# Altium PCB Arrows Keypad.PcbDoc
Units mil, origin at the board's own origin, x right, y up, seen from the top; angles counter-clockwise.
Board outline 2300 x 1915 mil, 2 copper layers (Top Layer, Bottom Layer); 9 components, 6 nets, 42 pads, 0 vias.
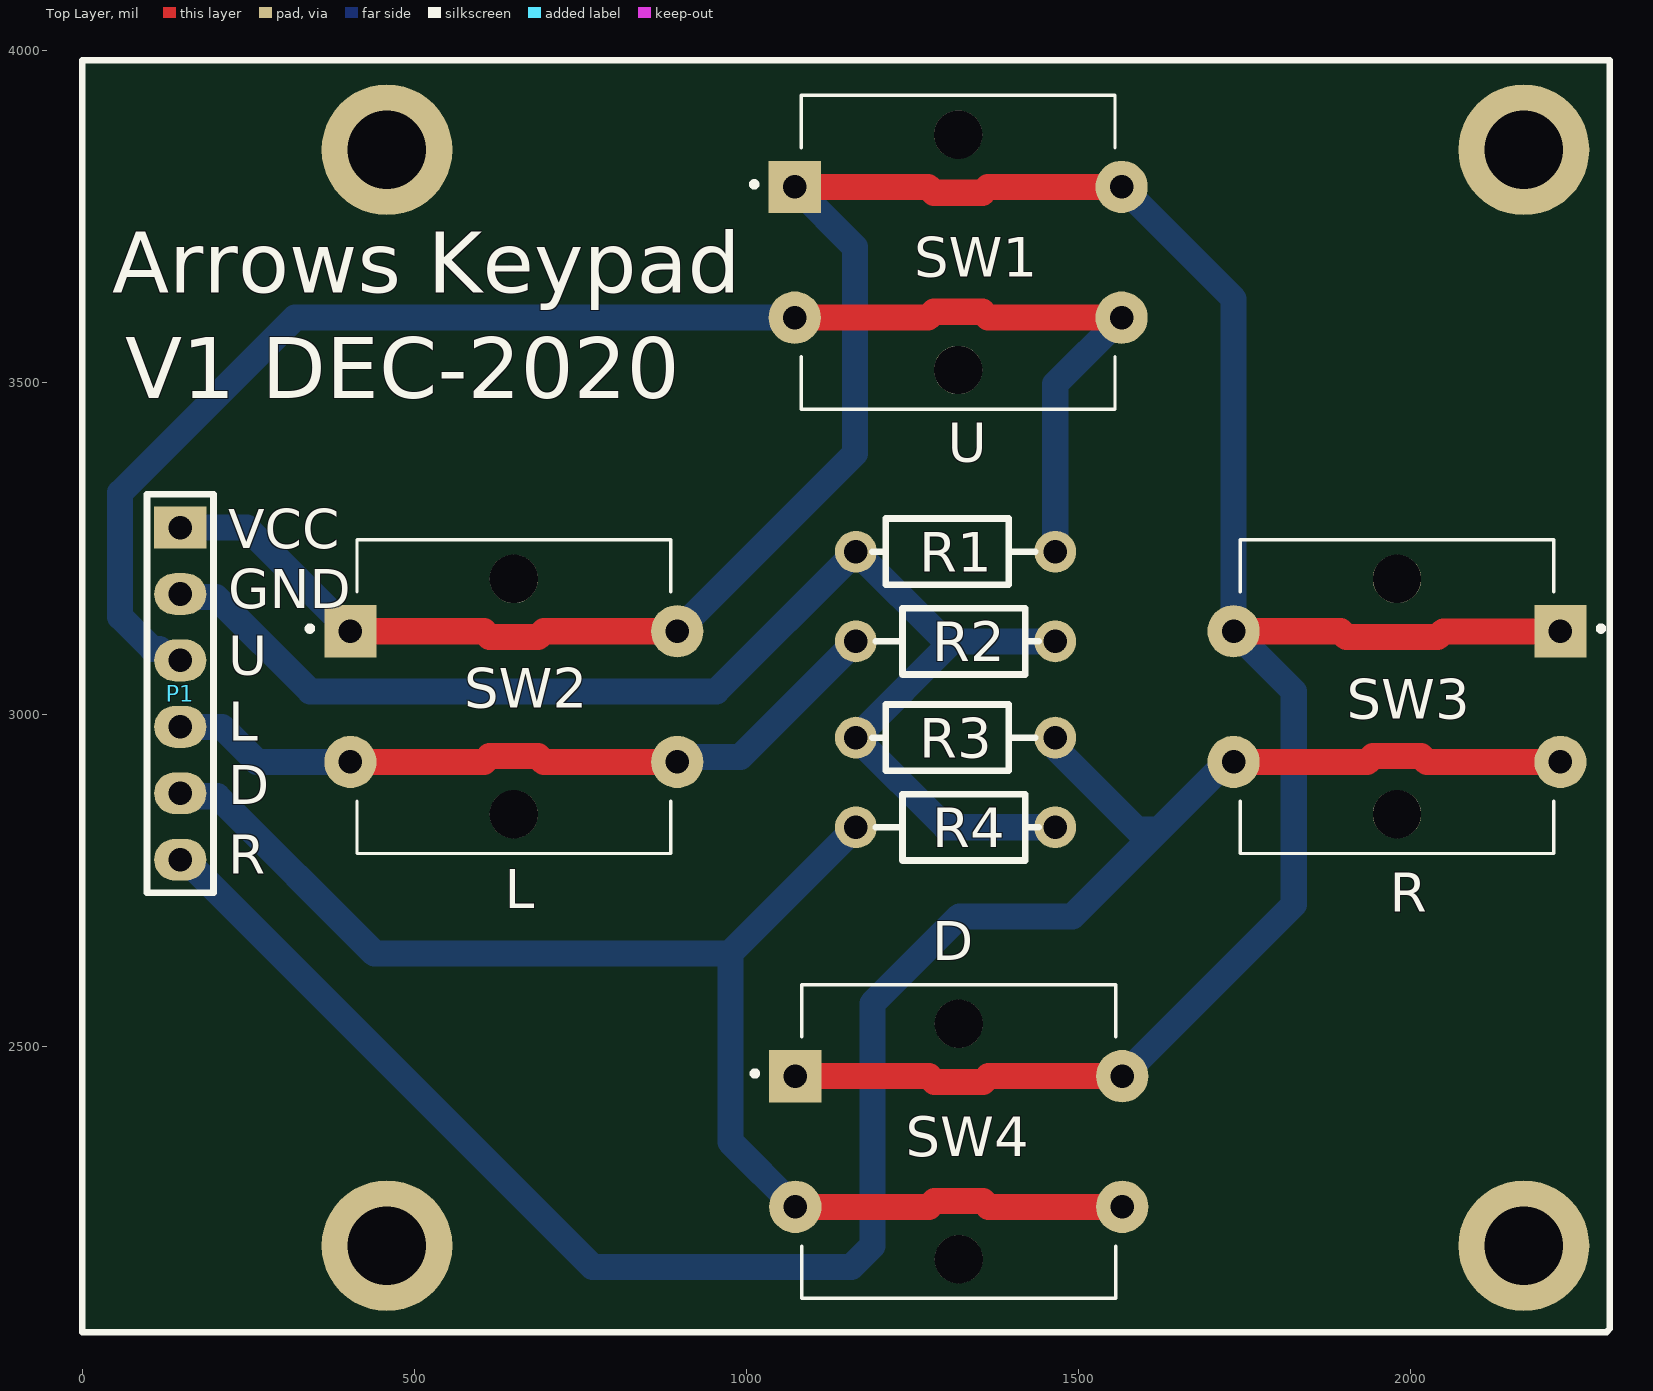
[diagram p0: Top Layer view]
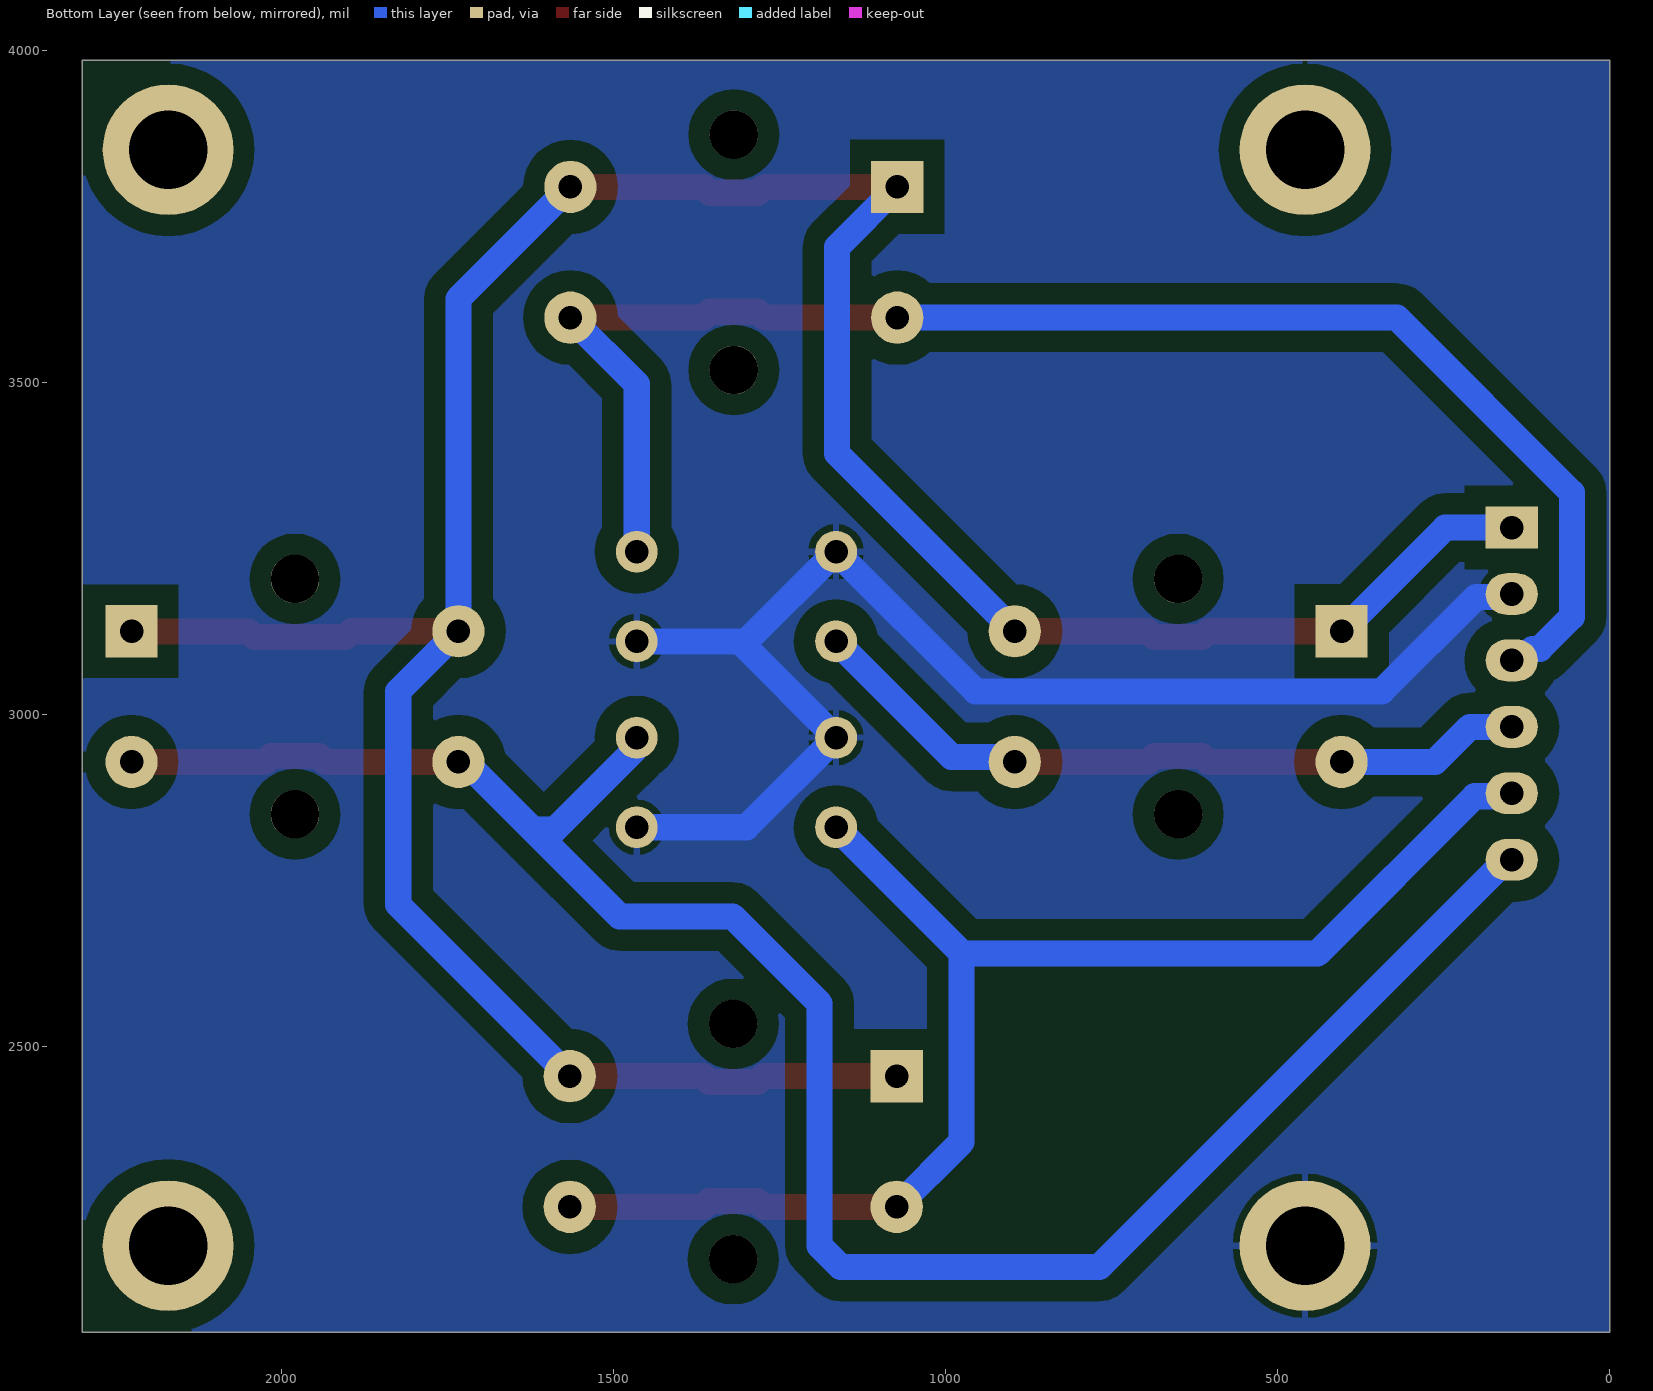
[diagram p1: Bottom Layer view, seen from below]
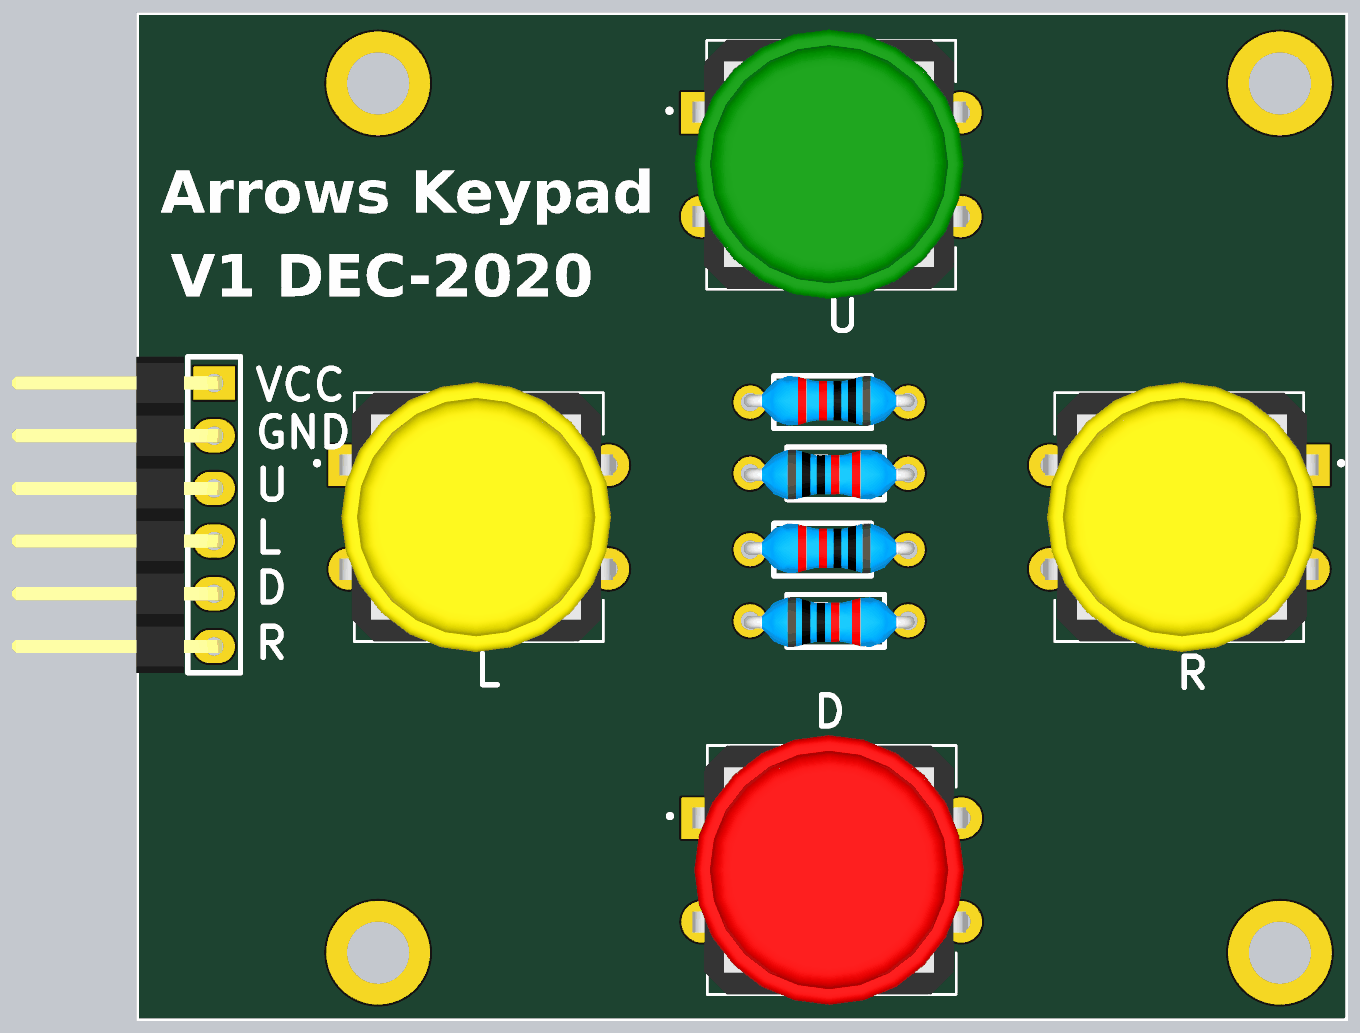
[diagram p2: 3D render of the assembled board from above, using the file's embedded part models]

## Layer stack, top to bottom
Top Solder: solder mask 0.4, Solder Resist, Dk 3.5
Top Layer: signal copper 1.4
Dielectric 1: dielectric 12.6, FR-4, Dk 4.8
Bottom Layer: signal copper 1.4
Bottom Solder: solder mask 0.4, Solder Resist, Dk 3.5

## Board outline
0,2070 2300,2070 2300,3985 0,3985

## Design rules (kind name [scope] priority, off if disabled: settings)
Clearance [All] p1: gap=31.5 ignorepadtopadclearanceinfootprint=FALSE
PolygonConnect [All] p1: connectstyle=Relief reliefconductorwidth=10 reliefentries=4 polygonreliefangle="90 Angle" airgapwidth=10
RoutingVias [All] p1: holewidth=28 width=50 viastyle="Through Hole" minholewidth=28 minwidth=50 maxholewidth=28 maxwidth=50
SolderMaskExpansion [All] p1: expansion=4 istentingtop=FALSE
Width [All] p1: maxlimit=59.06 minlimit=31.5 preferedwidth=39.37
30 further rules are at their usual default settings.

## Components (designator, comment, footprint, x,y, rotation, side; value= is the part's Value field where it differs from the comment)
P1 "Header bounded 6 Pins" "HEADER MALE 2.54MM 6 PINS TH RIGHT" 147.6,3031.29 r270 top locked
R1 "10K 0.25W" "RES 7.62MM H TH" 1315,3245 r0 top
R2 "10K 0.25W" "RES 7.62MM H TH" 1315,3110 r180 top
R3 "10K 0.25W" "RES 7.62MM H TH" 1315,2965 r0 top
R4 "10K 0.25W" "RES 7.62MM H TH" 1315,2830 r180 top
SW1 "12*12 DIP tactile Green" "TACTILE 12*12 TH GREEN OMRON" 1318.86,3695.77 r0 top locked
SW2 "12*12 DIP tactile Yellow" "TACTILE 12*12 TH YELLOW OMRON"#1 649.91,3026.83 r0 top locked
SW3 "12*12 DIP tactile Yellow" "TACTILE 12*12 TH YELLOW OMRON"#2 1979.62,3026.82 r180 top locked
SW4 "12*12 DIP tactile Red" "TACTILE 12*12 TH RED OMRON" 1319.77,2356.97 r0 top locked

## Footprints (in the part's own frame and the unit in brackets; to place one, negate y for a bottom-side part, rotate by r counter-clockwise, add the part's x,y. Pads: shape width x height; smd on the part's side, far side on the other; paste and mask are expansions set on the pad)
"HEADER MALE 2.54MM 6 PINS TH RIGHT" [mm] "Header Male 2.54mm 6 Pins TH"
  rect 1.6x2 hole 0.9: 1(-6.35,0)
  oval 1.6x2 hole 0.9: 2(-3.81,0) 3(-1.27,0) 4(1.27,0) 5(3.81,0) 6(6.35,0)
  silkscreen extent -7.62,-1.27 7.62,1.27, body extent -7.62,-9.75 7.62,0.38, height 2.51
"RES 7.62MM H TH" [mm]
  round 1.6 hole 0.9: 1(-3.81,0) 2(3.81,0)
  silkscreen extent -3.17,-1.27 3.05,1.27, body extent -4.11,-1.14 4.11,1.27, height 3.36
"TACTILE 12*12 TH GREEN OMRON" [mm]
  rect 2x2 hole 0.9: 1(-6.25,2.5)
  round 2 hole 0.9: 1(6.25,2.5) 2(-6.25,-2.5) 2(6.25,-2.5)
  round 1.85 hole 1.85 unplated: ""(0,-4.5) ""(0,4.5)
  silkscreen extent -7.9,-6 6,6, body extent -6.81,-6.48 6.6,6.52, height 10
"TACTILE 12*12 TH RED OMRON" [mm]
  rect 2x2 hole 0.9: 1(-6.25,2.5)
  round 2 hole 0.9: 1(6.25,2.5) 2(-6.25,-2.5) 2(6.25,-2.5)
  round 1.85 hole 1.85 unplated: ""(0,-4.5) ""(0,4.5)
  silkscreen extent -7.9,-6 6,6, body extent -6.84,-6.5 6.58,6.5, height 10
"TACTILE 12*12 TH YELLOW OMRON"#1 [mm]
  rect 2x2 hole 0.9: 1(-6.25,2.5)
  round 2 hole 0.9: 1(6.25,2.5) 2(-6.25,-2.5) 2(6.25,-2.5)
  round 1.85 hole 1.85 unplated: ""(0,-4.5) ""(0,4.5)
  silkscreen extent -7.9,-6 6,6, body extent -6.84,-6.5 6.58,6.5, height 10
"TACTILE 12*12 TH YELLOW OMRON"#2 [mm]
  rect 2x2 hole 0.9: 1(-6.25,-2.5)
  round 2 hole 0.9: 1(6.25,-2.5) 2(-6.25,2.5) 2(6.25,2.5)
  round 1.85 hole 1.85 unplated: ""(0,4.5) ""(0,-4.5)
  silkscreen extent -7.9,-6 6,6, body extent -6.84,-6.5 6.58,6.5, height 10

## Part data
P1: library part Terminal_Block_6Pos, Case/Package=2340-6111TG, Colour=Black, Current Rating=3A, Manufacturer=3M, Max Operating Temperature=105°C, Min Operating Temperature=-55°C, Package Description="Male Header, Pitch 2.54 mm, 1 x 40 Position, Height 8.636 mm, Tail Length 3.05 mm", Package Quantity=200, Connector Type=Header, Contact Finish=Gold, Contact Material=Copper, Contact Plating=Gold, Datasheet URL=https://datasheet.ciiva.com/5161/ts0766-242217-5161112.pdf, Datasheet Version=Aug-08, Gender=Male, Lead Pitch=0.1inch, Manufacturer URL=http://www.3m.com/, Max Current Rating=3A, Mounting Technology=TH, Package Reference=2340-6111TG, Packaging=Bulk, Pins=40, RoHS Compliant=True, Rows=1
R1 R2 R3 R4: library part Resistors_Single, "Resistors", Case/Package=Axial, Manufacturer=Yageo, Manufacturer Part Number=CFR-25JB-52-100K, Max Operating Temperature=155°C, Max Power Dissipation=250mW, Min Operating Temperature=-55°C, Package Quantity=200, Resistance=100kR, Resistor Type="Carbon Film", Supplier Part Number 1=100KQBK-ND, Temperature Coefficient=-700ppm/°C, Tolerance=5%, Category="Through-Hole Resistors", ComponentLink1Description=http://www.yageo.com/NewPortal/yageodocoutput?fileName=/pdf/throughhole/Yageo_LR_CFR_2013.pdf&src-supplier=Digi-Key, ComponentLink1URL=http://www.yageo.com/NewPortal/yageodocoutput?fileName=/pdf/throughhole/Yageo_LR_CFR_2013.pdf&src-supplier=Digi-Key, ComponentLink2Description=http://www.yageo.com/documents/recent/General%20Type_CFR.pdf?src-supplier=Future+Electronics, ComponentLink2URL=http://www.yageo.com/documents/recent/General%20Type_CFR.pdf?src-supplier=Future+Electronics, Lead Free="Lead Free", Length=0.248inch, Number of Terminations=2, Packaging=Bulk, Power Rating=250mW, Pricing 1="1=0.10000, 25=0.04640, 50=0.03600, 100=0.02580, 250=0.02008, 500=0.01596, 750=0.01365, 1000=0.01133, 2000=0.00979 (USD)", RoHS=Yes, Stock 1=105911, Supplier 1=Digi-Key
SW1 SW2 SW3 SW4: library part Switches_2Pos, "Switches", Color=Black, Contact Current Rating=50mA, Contact Resistance=100mR, Manufacturer=E-Switch, Manufacturer Part Number=TL1105LF160Q, Max Operating Temperature=70°C, Max Voltage Rating (DC)=50V, Min Operating Temperature=-20°C, Operating Force=160gf, Package Quantity=750, Supplier Part Number 1=EG2505-ND, Voltage Rating (DC)=12V, Actuator Length=13.4mm, Actuator Material=Nylon,Polyamide, Actuator Type=Standard, Category="Tactile Switches", ComponentLink1Description=https://datasheet.ciiva.com/16156/p010009-16156269.pdf?src-supplier=Onlinecomponents.com, ComponentLink1URL=https://datasheet.ciiva.com/16156/p010009-16156269.pdf?src-supplier=Onlinecomponents.com, ComponentLink2Description=https://datasheet.ciiva.com/2900/tl1105-2900888.pdf?src-supplier=Digi-Key, ComponentLink2URL=https://datasheet.ciiva.com/2900/tl1105-2900888.pdf?src-supplier=Digi-Key, Contact Material=Silver,Bronze, Contact Plating=Silver, Current Rating=50mA, Electrical Life=100000Cycles, Housing Material=Nylon, Illumination Type=Non-Illuminated, Lead Free="Lead Free", Mechanical Life=100000Cycles, Mount="Through Hole", Orientation=Straight, Packaging=Bulk, Pricing 1="1=0.29000, 10=0.27800, 25=0.26400, 100=0.23900, 250=0.21792, 500=0.20256, 1000=0.17280, 2500=0.16800, 5000=0.15840 (USD)", RoHS=Yes, Stock 1=17577, Supplier 1=Digi-Key, Switch Function=Off-Mom, Switch Travel=0.25mm, Termination="PC Pin", Throw Configuration=SPST, Width=6mm

## Free pads (board coordinates)
  round 196.85 hole 118.11: 2(458.87,2200) 2(458.87,3850) 2(2170.66,2200) 2(2170.66,3850)

## Nets (pads, with @x,y where several pads share a name; then routed paths per layer and width w, separated by ;. In a path a pad name is that pad's centre, name@x,y a point inside that pad or via, vN(x,y) a via of type N, cw(c..) or ccw(c..) an arc to the next point about the centre after c; other vN are vias at no path point)
CANCEL: P1.5 R4.2 SW4.2 | length 2118
  Top Layer w39.37: SW4.2@1073.7,2258.55 1274.62,2258.55 1283.48,2267.41 1356.05,2267.41 1364.91,2258.55 SW4.2@1565.83,2258.55
  Bottom Layer w39.37: P1.5 152.12,2876.77 203.23,2876.77 440,2640 976.05,2640 ; SW4.2@1073.7,2258.55 976.05,2356.2 976.05,2641.05 R4.2
GND: P1.2 pad.2@458.87,2200 R1.1 R2.1 R3.1 R4.1 | length 2082.1
  Bottom Layer w39.37: P1.2 152.12,3176.77 201.21,3176.77 343.28,3034.7 954.7,3034.7 R1.1 1300,3110 1310,3110 ; R4.1 1300,2830 R3.1 1310,3110 ; R2.1 1310,3110
LEFT: P1.4 R2.2 SW2.2 | length 1121.9
  Top Layer w39.37: SW2.2@403.85,2928.4 604.77,2928.4 613.62,2937.26 686.19,2937.26 695.05,2928.4 SW2.2@895.97,2928.4
  Bottom Layer w39.37: P1.4 210.52,2981.29 263.4,2928.4 SW2.2@403.85,2928.4 ; SW2.2@895.97,2928.4 903.5,2935.94 990.94,2935.94 R2.2
OK: P1.3 R1.2 SW1.2 | length 2322.8
  Top Layer w39.37: SW1.2@1072.8,3597.35 1273.72,3597.35 1282.58,3606.2 1355.15,3606.2 1364.01,3597.35 SW1.2@1564.93,3597.35
  Bottom Layer w39.37: P1.3 133.33,3081.29 116.01,3098.61 105.48,3098.61 57.05,3147.04 57.05,3333.98 320.41,3597.35 SW1.2@1072.8,3597.35 ; R1.2 1465,3497.42 SW1.2@1564.93,3597.35
RIGHT: P1.6 R3.2 SW3.2 | length 3090.8
  Top Layer w39.37: SW3.2@1733.56,2928.4 1934.48,2928.4 1943.33,2937.26 2015.9,2937.26 2024.76,2928.4 SW3.2@2225.68,2928.4
  Bottom Layer w39.37: P1.6 155.47,2781.29 768.76,2168 1158,2168 1190,2200 1190,2565 1320.65,2695.65 1490.65,2695.65 1621.31,2826.31 ; R3.2 1469.52,2960.48 1469.52,2945.48 1588.69,2826.31 1621.31,2826.31 ; SW3.2@1733.56,2928.4 1723.4,2928.4 1621.31,2826.31
VCC: P1.1 SW1.1 SW2.1 SW3.1 SW4.1 | length 4689.1
  Top Layer w39.37: SW2.1@403.85,3125.25 604.77,3125.25 613.62,3116.4 686.19,3116.4 695.05,3125.25 SW2.1@895.97,3125.25 ; SW1.1@1072.8,3794.2 1273.72,3794.2 1282.58,3785.34 1355.15,3785.34 1364.01,3794.2 SW1.1@1564.93,3794.2 ; SW4.1@1073.7,2455.4 1274.62,2455.4 1283.48,2446.54 1356.05,2446.54 1364.91,2455.4 SW4.1@1565.83,2455.4 ; SW3.1@1733.56,3125.25 1894.75,3125.25 1903.61,3116.39 2040.81,3116.39 2049.42,3125 2225.43,3125 SW3.1@2225.68,3125.25
  Bottom Layer w39.37: P1.1 247.81,3281.29 SW2.1@403.85,3125.25 ; SW2.1@895.97,3125.25 1163.35,3392.64 1163.35,3703.64 SW1.1@1072.8,3794.2 ; SW1.1@1564.93,3794.2 1733.56,3625.57 1733.56,3125.25 1824.11,3034.7 1824.11,2713.68 SW4.1@1565.83,2455.4
pads on no net: SW1. SW2. SW3. SW4.

## Polygon pours and split planes (outlines as drawn)
GND on Bottom Layer "GND_L02_P000" (solid, remove dead copper, pour order 0): 0,2070 2300,2070 2300,3985 0,3985

## Silkscreen, mask and mechanical layers (free items; w line width, h text height)
Top Overlay:
  lines w10: 0,2070 0,3985 2300,3985 2300,2075 2295,2070 0,2070
  text "Arrows Keypad" at 45.44,3604.66 h157.48
  text "V1 DEC-2020" at 64.56,3445.92 h157.48
  text "U" at 1302.93,3380.5 h59.06
  text "VCC" at 220,3250 h59.06
  text "GND" at 220,3160 h59.06
  text "U" at 220,3060 h59.06
  text "L" at 220,2960 h59.06
  text "D" at 220,2865 h59.06
  text "R" at 220,2760 h59.06
  text "L" at 636.21,2708.18 h59.06
  text "R" at 1968.41,2703.11 h59.06
  text "D" at 1280,2630 h59.06